# Allegro board avrusb500.brd
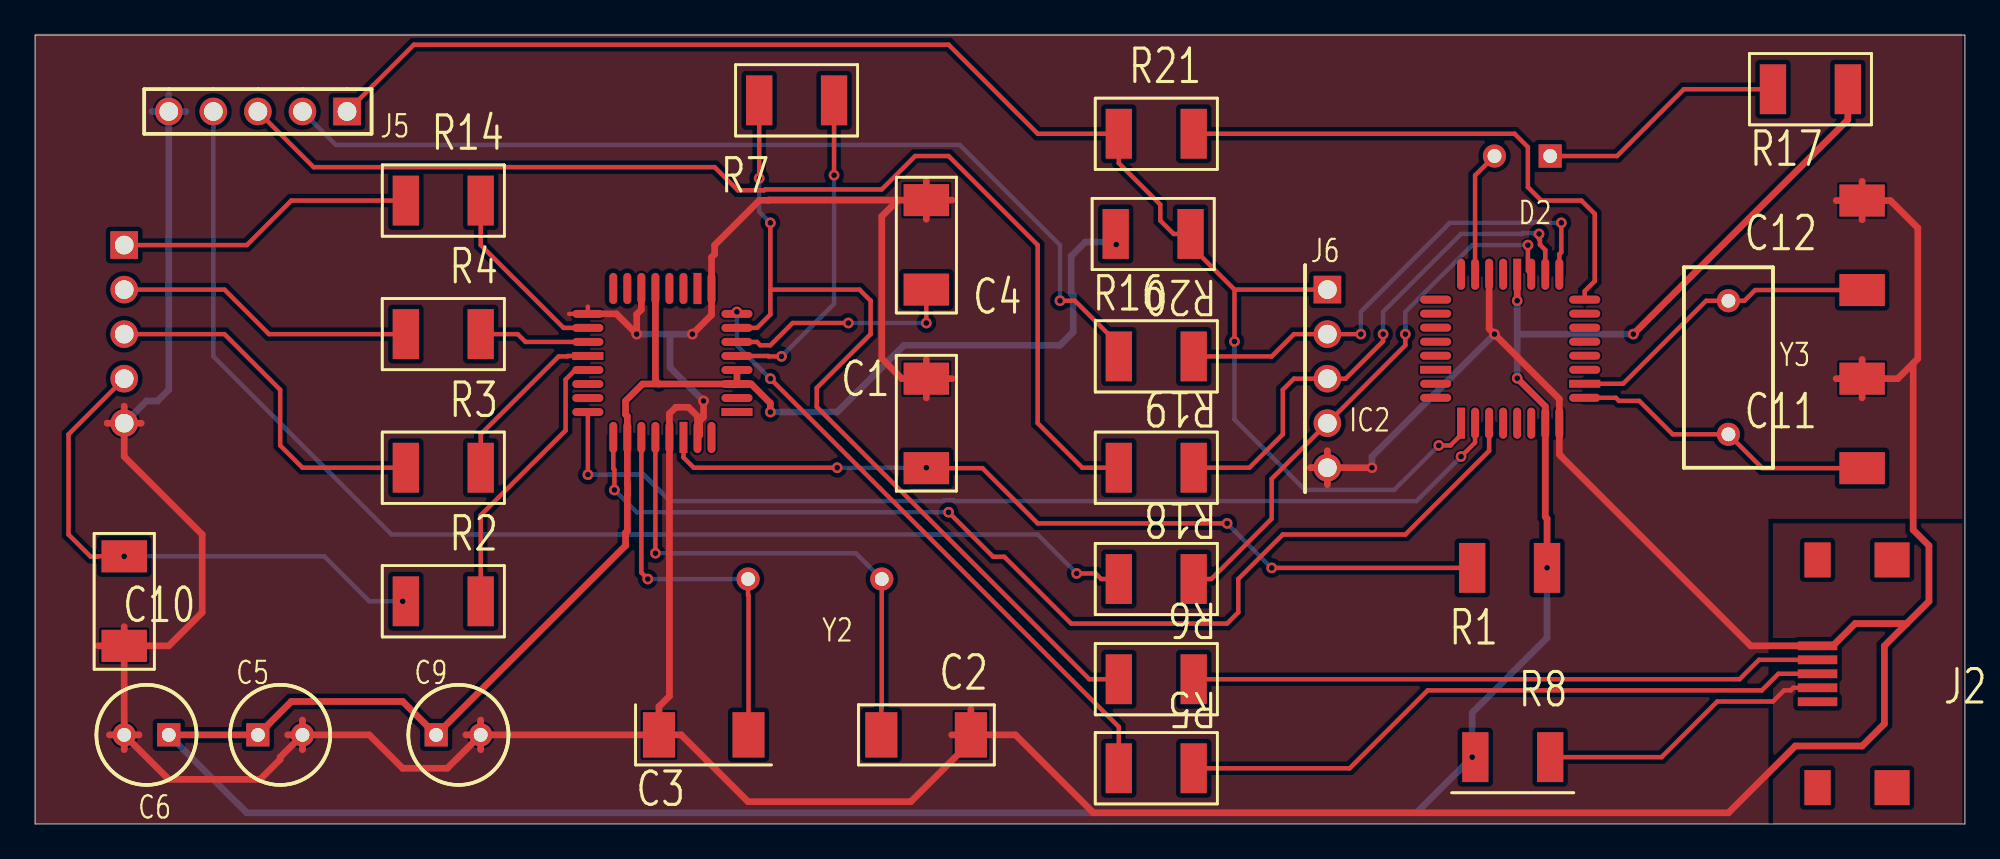
[diagram p0: board, top side]
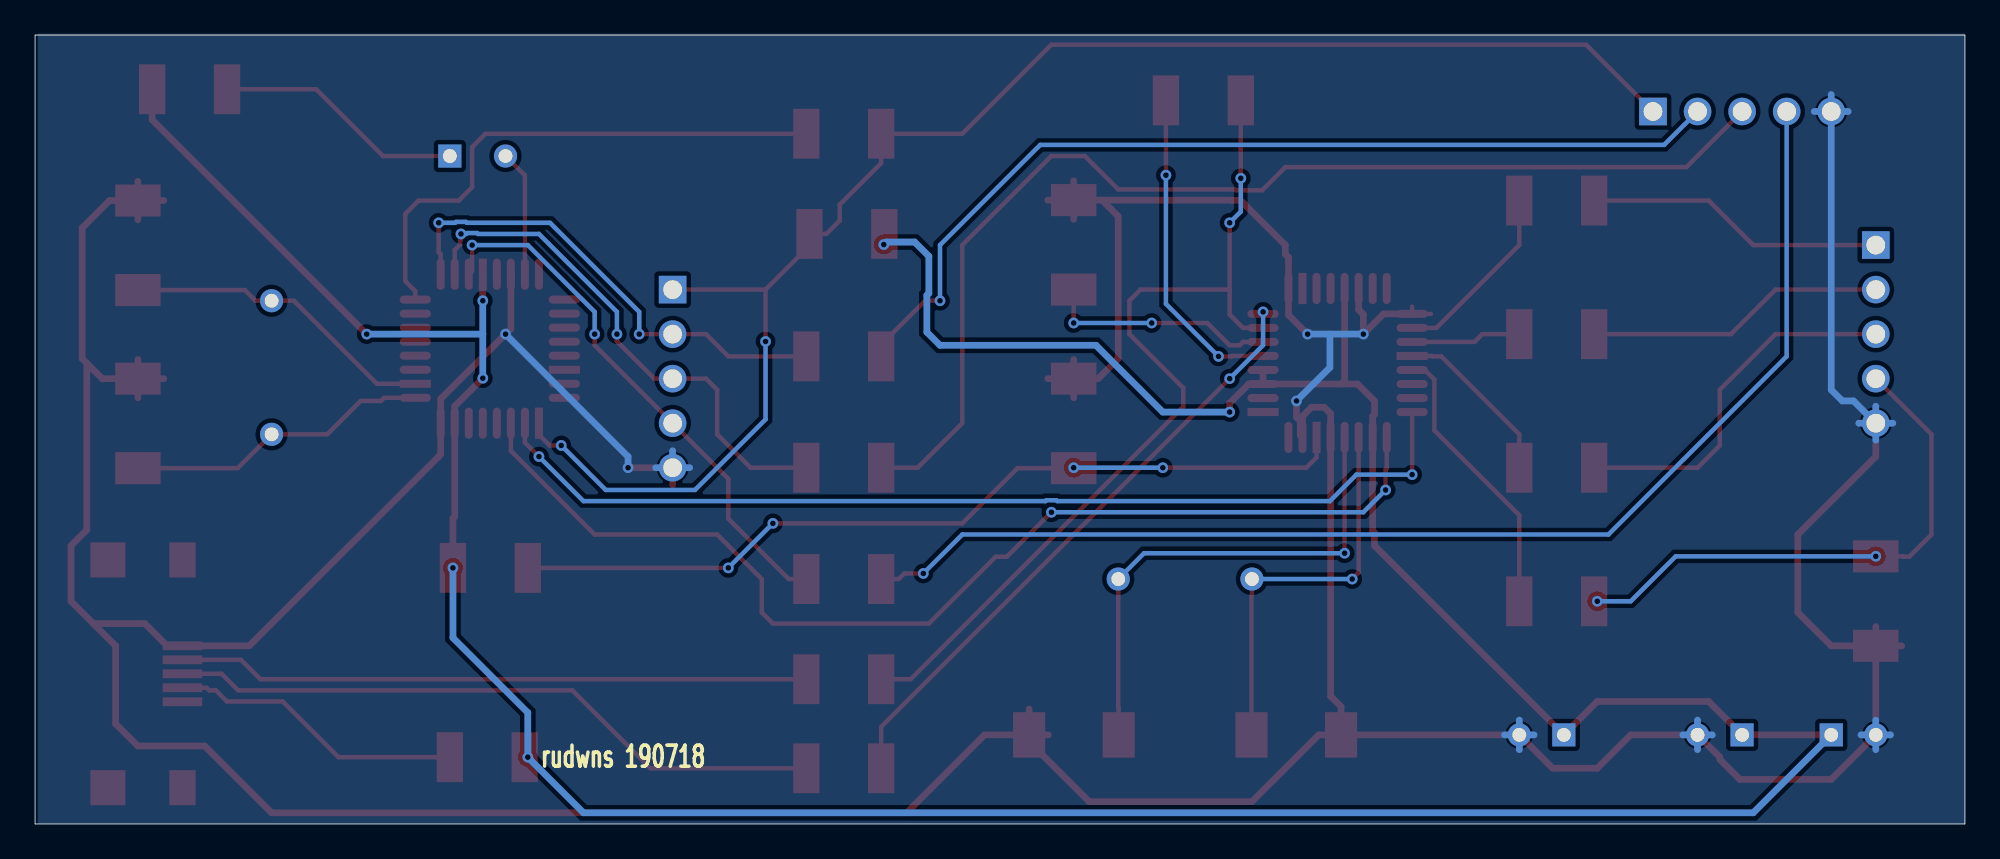
[diagram p1: board, bottom side, seen from below]

Outline 110 x 45 mm; copper layers: TOP, BOTTOM. Coordinates in mm from the lower left corner of the outline.
Outline path: 0,45 110,45 110,0 0,0 0,45

## Design rules (mm)
constraint set DEFAULT: min track width 0.254
net group POWERNETS: nets VCC

## Placement (name value [footprint] x y rotation side)
C1  47nF  [CPCYL1D225LS100031]  50.8 25.4 270 top
C2  27pF  [CPCYL1D225LS100031]  53.34 5.08 180 top
C3  27pF  [CPCYL1D225LS100031]  35.56 5.08 0 top
C4  47nF  [CPCYL1D225LS100031]  50.8 30.48 90 top
C5  100nF  [CPCYL1D225LS100031#2]  12.7 5.08 0 top
C6  1uF  [CPCYL1D225LS100031#2]  7.62 5.08 180 top
C9  100nF  [CPCYL1D225LS100031#2]  22.86 5.08 0 top
C10  22nF  [CPCYL1D225LS100031]  5.08 10.16 90 top
C11  100nF  [CPCYL1D225LS100031]  104.14 25.4 270 top
C12  100nF  [CPCYL1D225LS100031]  104.14 35.56 270 top
D2  LED  [CYLD250LS125031]  86.36 38.1 180 top
IC2  ATmega8  [QUAD80M32WG900]  81.28 22.86 0 top
J1  bbpg_Bitbang  [BLKCON100VHTM1SQSW1005]  5.08 33.02 270 top
J2  USBA  [USBMINIB]  101.6 10.16 270 top
J5  avrusb500_out  [BLKCON100VHTM1SQSW1005]  17.78 40.64 180 top
J6  firmware_in  [BLKCON100VHTM1SQSW1005]  73.66 30.48 270 top
NOREF  -  []  0 45 0 top
NOREF#2  -  []  110 0 90 top
R1  470  [AX400X100031]  81.92 14.61 0 top
R2  220  [AX400X100031]  25.4 12.7 180 top
R3  220  [AX400X100031]  25.4 20.32 180 top
R4  220  [AX400X100031]  25.4 27.94 180 top
R5  27  [AX400X100031]  66.04 3.17 180 top
R6  27  [AX400X100031]  66.04 8.26 180 top
R7  1.5k  [AX400X100031]  41.27 41.27 0 top
R8  2.2  [AX400X100031]  86.36 3.81 180 top
R14  220  [AX400X100031]  25.4 35.56 180 top
R16  10k  [AX400X100031]  61.59 33.66 0 top
R17  470  [AX400X100031]  99.06 41.91 0 top
R18  1k  [AX400X100031]  66.04 13.97 180 top
R19  220  [AX400X100031]  66.04 20.32 180 top
R20  1k  [AX400X100031]  66.04 26.67 180 top
R21  220  [AX400X100031]  66.04 39.37 180 top
U1  FT232BM  [QUAD80M32WG900]  40.01 23.5 90 top
Y2  6Mhz  [RAD450X200LS300031]  48.26 13.97 180 top
Y3  3.6864Mhz  [RAD450X200LS300031]  96.52 29.84 270 top

## Library data of the parts
C1-C4 C10-C12 = CAPACITOR NON-POL: alternate symbols: (SMR2010)
C5 C9 = CAPACITOR NON-POL: alternate symbols: (SMDCAP)
C6 = CAPACITOR POL: alternate symbols: (SMDCAP)
D2 = LED
IC2 = ATmega8-DIL28_1
J1 J5 J6 = CON5
J2 = CON4_6
R1-R8 R14 R16-R21 = R: alternate symbols: (SML2015)
U1 = FT232BM_2: alternate symbols: (JEDECMS026)
Y2 Y3 = ZTA

## Footprints (pads in the part's own frame, mm; a bottom-side part is the same pattern mirrored in y, then rotated)
AX400X100031
  rect 1.499x2.845 smd: 1(0,0) 2(4.267,0)
BLKCON100VHTM1SQSW1005
  rect 1.575x1.575 hole 1.067: 1(0,0)
  round 1.575 hole 1.067: 2(2.54,0) 3(5.08,0) 4(7.62,0) 5(10.16,0)
CPCYL1D225LS100031
  rect 1.829x2.591 smd: 1(0,0) 2(5.105,0)
CPCYL1D225LS100031#2
  rect 1.321x1.321 hole 0.787: 1(0,0)
  round 1.321 hole 0.787: 2(2.54,0)
CYLD250LS125031
  rect 1.321x1.321 hole 0.787: 1(0,0)
  round 1.321 hole 0.787: 2(3.175,0)
QUAD80M32WG900
  rect 0.457x1.778 smd: 1(0,0) 20(3.2,8.496)
  oval 0.457x1.778 smd: 2(0.8,0) 3(1.6,0) 4(2.4,0) 5(3.2,0) 6(4,0) 7(4.801,0) 8(5.601,0) 17(5.601,8.496) 18(4.801,8.496) 19(4,8.496) 21(2.4,8.496) 22(1.6,8.496) 23(0.8,8.496) 24(0,8.496)
  oval 1.778x0.457 smd: 9(7.048,1.448) 11(7.048,3.048) 12(7.048,3.848) 13(7.048,4.648) 14(7.048,5.448) 15(7.048,6.248) 16(7.048,7.048) 25(-1.448,7.048) 26(-1.448,6.248) 27(-1.448,5.448) 28(-1.448,4.648) 29(-1.448,3.848) 31(-1.448,2.248) 32(-1.448,1.448)
  rect 1.778x0.457 smd: 10(7.048,2.248) 30(-1.448,3.048)
RAD450X200LS300031
  round 1.321 hole 0.787: 1(0,0) 2(7.62,0)
USBMINIB
  rect 0.5x2.25 smd: 1(0,0) 2(0.798,0) 3(1.595,0) 4(2.393,0) 5(3.19,0)
  rect 2x1.5 smd: SHIELD1(-4.9,0) SHIELD2(8.09,0)
  rect 2x2 smd: SHIELD3(-4.9,4.25) SHIELD4(8.09,4.25)

## Nets
+5V: J2.4 R8.1
GND: C1.1 C2.1 C3.1 C4.2 C5.2 C6.2 C9.2 C10.1 C11.1 C12.1 IC2.8 IC2.22 J1.5 J2.1 J5.5 J6.5 U1.9 U1.14 U1.17 U1.29 U1.31
VCC: C5.1 C6.1 C9.1 IC2.7(VCC) IC2.20 R1.2 R8.2 R16.1 R17.2 U1.3 U1.4 U1.13 U1.26
BMISO: J1.3 R3.2
BMOSI: J1.2 R4.2
BRESET: J1.1 R14.2
BSCK: C10.2 J1.4 R2.2
D+: J2.2 R6.1
D-: J2.3 R5.1
F_MISO: IC2.18 J6.3 R19.1
F_MOSI: IC2.17 J6.2 R20.1
F_SCK: IC2.19 J6.4 R18.1
MISO: J5.3 R19.2
MOSI: J5.2 R20.2
RESET: IC2.1 J5.1 J6.1 R16.2 R21.2
RXD: IC2.2 U1.24
SCK: J5.4 R18.2
TXD: IC2.3 U1.25
N02483: R6.2 R7.1 U1.7
N02615: R5.2 U1.8
N03527: C4.1 U1.6
N06839: R2.1 U1.21
N06967: R3.1 U1.20
N07033: R4.1 U1.19
N07247: R14.1 U1.18
N11951: R7.2 U1.5
N41098: C3.2 U1.27 Y2.2
N41106: C2.2 U1.28(XTOUT) Y2.1
N49165: C1.2 R1.1 U1.30
N95733: D2.2(CATHODE) IC2.23
N95737: D2.1 R17.1
N95749: C11.2 IC2.9 Y3.2
N95885: C12.2 IC2.10 Y3.1
N96027: IC2.16 R21.1

Pads without a net: IC2 4 5 6 11 12 13 14 15 21 24 25 26 27 28 29 30 31 32; J2 5 SHIELD1 SHIELD2 SHIELD3 SHIELD4; U1 1 2 10 11 12 15 16 22 23 32

## Via types
v1: diameter 0.61, hole 0.33, TOP to BOTTOM, 42 vias

## Routing (per net, layer and track width the routed paths; a pad name or vN(x,y) marks a point on that pad's centre or on a via; arc(x,y) is an arc through that point)
+5V: length 16.9
  TOP w0.254: R8.1 92.71,3.81 95.89,6.99 99.06,6.99 99.69,7.62 100.07,7.62 100.22,7.77 J2.4
GND: length 363.6
  TOP w0.254: 31.51,29.5 U1.17 30.44,29.1
  TOP w0.381: C5.2 13.97,3.81 13.97,3.68 12.83,2.54 7.62,2.54 C6.2 ; C5.2 15.24,4.24 ; C5.2 15.24,5.92 ; C5.2 14.4,5.08 ; C5.2 19.05,5.08 20.95,3.17 23.5,3.17 C9.2 ; C12.1 104.14,36.66 ; C12.1 102.66,35.56 ; C12.1 105.75,35.56 107.31,34 107.31,26.54 107.05,26.28 ; C12.1 104.14,34.47 ; J1.5 6.05,22.86 ; J1.5 4.11,22.86 ; J1.5 5.08,20.95 9.53,16.51 9.53,12.06 7.62,10.16 C10.1 ; J1.5 5.08,23.83 ; 106.68,11.43 103.75,11.43 102.47,10.16 J2.1 97.79,10.16 87,20.95 87,20.97 86.88,21.08 IC2.8 86.88,24.24 v1(83.19,27.94) 82.88,28.25 IC2.22 ; 106.68,11.43 107.95,12.7 107.95,15.88 107.05,16.77 107.05,26.28 ; 106.68,11.43 105.41,10.16 105.41,5.71 104.14,4.45 100.33,4.45 96.52,0.64 60.33,0.64 55.88,5.08 C2.1 ; 3.6,10.16 C10.1 ; C10.1 5.08,11.26 ; C10.1 C6.2 ; v1(37.47,27.94) 38.56,29.03 U1.9 38.56,32.32 38.73,32.5 38.73,33.02 41.29,35.57 41.8,35.57 41.81,35.59 49.19,35.59 ; C9.2 25.4,5.92 ; C9.2 24.56,5.08 ; C9.2 C3.1 ; C9.2 25.4,4.24 ; C1.1 50.8,26.5 ; C1.1 52.28,25.4 ; C1.1 49.4,25.4 48.26,26.54 48.26,34.66 49.19,35.59 ; C1.1 50.8,24.3 ; U1.14 34.56,29.34 34.29,29.07 v1(34.29,27.94) 33.13,29.1 U1.17 ; 107.05,26.28 106.17,25.4 C11.1 ; 50.8,34.49 C4.2 ; C4.2 49.19,35.59 ; C4.2 52.28,35.59 ; C4.2 50.8,36.68 ; C6.2 4.24,5.08 ; C6.2 5.92,5.08 ; C6.2 5.08,4.24 ; C11.1 104.14,26.5 ; C11.1 104.14,24.3 ; C11.1 102.66,25.4 ; 73.66,19.35 J6.5 ; J6.5 v1(76.2,20.32) ; J6.5 73.66,21.29 ; J6.5 72.69,20.32 ; C2.1 53.34,6.56 ; C2.1 53.34,4.7 49.91,1.27 40.64,1.27 36.83,5.08 C3.1 ; C2.1 52.24,5.08 ; v1(38.1,24.13) 38.1,23.2 37.88,22.99 37.88,22.17 37.76,22.05 37.76,23.25 37.24,23.77 36.52,23.77 36.16,23.41 U1.29 36.16,7.29 35.56,6.69 C3.1
  BOTTOM w0.381: 36.2,27.94 36.2,26.04 v1(38.1,24.13) ; 36.2,27.94 v1(34.29,27.94) ; 36.2,27.94 v1(37.47,27.94) ; 4.24,5.08 C6.2 ; C6.2 5.08,5.92 ; C6.2 5.08,4.24 ; C6.2 5.92,5.08 ; 6.65,40.64 J5.5 ; J5.5 7.62,24.77 6.99,24.13 6.35,24.13 J1.5 ; J5.5 8.59,40.64 ; J5.5 7.62,41.61 ; C5.2 15.24,5.92 ; C5.2 15.24,4.24 ; C5.2 16.08,5.08 ; C5.2 14.4,5.08 ; J1.5 5.08,23.83 ; J1.5 4.11,22.86 ; J1.5 6.05,22.86 ; J1.5 5.08,21.89 ; C9.2 26.24,5.08 ; C9.2 25.4,5.92 ; C9.2 24.56,5.08 ; C9.2 25.4,4.24 ; v1(76.2,20.32) 76.2,20.95 v1(83.19,27.94) ; 72.69,20.32 J6.5 ; J6.5 74.63,20.32 ; J6.5 73.66,21.29
VCC: length 216
  TOP w0.381: 35.56,25.09 34.62,25.09 33.66,24.13 33.66,23.36 33.76,23.25 33.76,19.37 33.77,19.36 33.77,18.74 33.76,18.73 33.76,16.71 33.66,16.61 33.66,15.88 C9.1 20.95,6.99 14.61,6.99 C5.1 C6.1 ; 35.56,25.09 35.36,25.3 U1.13 ; 35.56,25.09 U1.3 ; U1.3 40.82,25.09 41.91,24 v1(41.91,23.5) ; U1.3 U1.4 ; IC2.20 v1(84.48,29.84) ; v1(84.48,25.43) 86.08,23.82 IC2.7 86.08,17.53 86.18,17.43 v1(86.18,14.61) ; v1(91.1,27.94) 103.33,40.17 R17.2
  BOTTOM w0.381: 84.48,27.94 v1(84.48,25.43) ; 84.48,27.94 v1(91.1,27.94) ; 84.48,27.94 v1(84.48,29.84) ; C6.1 12.06,0.64 78.74,0.64 v1(81.92,3.81) 81.92,6.35 86.18,10.62 v1(86.18,14.61) ; v1(41.91,23.5) 45.72,23.5 49.53,27.3 58.42,27.3 59.17,28.05 59.17,30.16 59.05,30.27 59.05,32.38 59.86,33.19 61.48,33.19 v1(61.62,33.05)
BMISO: length 21.1
  TOP w0.254: J1.3 10.79,27.94 13.97,24.77 13.97,21.59 15.24,20.32 R3.2
BMOSI: length 17.1
  TOP w0.254: J1.2 10.79,30.48 13.34,27.94 R4.2
BRESET: length 17.1
  TOP w0.254: J1.1 12.06,33.02 14.61,35.56 R14.2
BSCK: length 30.9
  TOP w0.254: v1(5.08,15.27) 3.53,15.27 3.5,15.24 3.17,15.24 1.91,16.51 1.91,22.23 J1.4
  BOTTOM w0.254: v1(20.95,12.7) 19.05,12.7 16.48,15.27 v1(5.08,15.27)
D+: length 36
  TOP w0.254: J2.2 98.26,9.36 97.16,8.26 R6.1
D-: length 37.8
  TOP w0.254: R5.1 74.93,3.17 79.38,7.62 98.42,7.62 99.37,8.56 J2.3
F_MISO: length 30.2
  TOP w0.254: R19.1 69.22,20.32 71.12,22.23 71.12,24.77 71.75,25.4 J6.3 74.7,25.4 76.83,27.53 v1(76.83,27.94) ; v1(85.72,33.66) 85.72,33.36 85.78,33.3 85.78,33.04 86.08,32.74 IC2.18
  BOTTOM w0.254: v1(76.83,27.94) 76.83,29.21 81.28,33.66 84.75,33.66 84.81,33.71 85.38,33.71 85.43,33.66 v1(85.72,33.66)
F_MOSI: length 27.9
  TOP w0.254: v1(87,34.29) 87,32.61 86.88,32.5 IC2.17 ; R20.1 70.48,26.67 71.75,27.94 J6.2 v1(75.56,27.94)
  BOTTOM w0.254: v1(87,34.29) 86.06,34.29 86.01,34.34 85.44,34.34 85.39,34.29 80.64,34.29 75.56,29.21 v1(75.56,27.94)
F_SCK: length 31.1
  TOP w0.254: v1(78.11,27.94) 78.11,27.3 J6.4 70.48,19.68 70.48,17.41 67.04,13.97 R18.1 ; IC2.19 85.09,31.55 v1(85.09,33.02)
  BOTTOM w0.254: v1(78.11,27.94) 78.11,29.21 81.92,33.02 v1(85.09,33.02)
MISO: length 65.1
  TOP w0.254: R19.2 59.69,20.32 57.15,22.86 57.15,33.02 52.07,38.1 50.16,38.1 48.26,36.2 41.61,36.2 41.56,36.14 40.06,36.14 38.73,37.47 15.88,37.47 J5.3
MOSI: length 54.6
  TOP w0.254: R20.2 61.77,27.34 59.27,29.84 v1(58.42,29.84)
  BOTTOM w0.254: J5.2 17.14,38.73 52.7,38.73 58.42,33.02 v1(58.42,29.84)
RESET: length 89.1
  TOP w0.254: 68.36,30.48 65.86,32.98 R16.2 64.9,33.66 64.14,34.42 64.14,35.33 61.77,37.69 R21.2 57.15,39.37 52.07,44.45 21.59,44.45 J5.1 ; 68.36,30.48 J6.1 ; 68.36,30.48 v1(68.36,27.52) ; IC2.1 81.28,22.2 80.67,21.59 v1(80.01,21.59)
  BOTTOM w0.254: v1(68.36,27.52) 68.36,23.08 72.39,19.05 77.47,19.05 v1(80.01,21.59)
RXD: length 57.3
  TOP w0.254: IC2.2 82.08,21.75 v1(81.28,20.95) ; U1.24 v1(31.51,19.93)
  BOTTOM w0.254: v1(31.51,19.93) 34.68,19.93 36.2,18.41 51.73,18.41 51.78,18.47 52.35,18.47 52.41,18.41 78.74,18.41 v1(81.28,20.95)
SCK: length 70.8
  TOP w0.254: v1(59.37,14.29) 60.45,14.29 60.77,13.97 R18.2
  BOTTOM w0.254: v1(59.37,14.29) 57.15,16.51 20.32,16.51 10.16,26.67 J5.4
TXD: length 62.8
  TOP w0.254: v1(33.02,19.05) 33.02,20.21 32.96,20.27 U1.25 ; v1(52.07,17.78) 54.61,15.24 55.24,15.24 59.05,11.43 67.94,11.43 68.58,12.06 68.58,13.97 71.12,16.51 78.11,16.51 82.88,21.29 IC2.3
  BOTTOM w0.254: v1(52.07,17.78) 34.29,17.78 v1(33.02,19.05)
N02483: length 51.7
  TOP w0.254: 41.91,30.48 41.91,29.06 41.15,28.3 U1.7 ; 41.91,30.48 46.99,30.48 47.62,29.84 47.62,27.94 44.55,24.87 44.55,23.79 60.09,8.26 R6.2 ; 41.91,30.48 v1(41.91,34.29) ; R7.1 v1(41.27,36.83)
  BOTTOM w0.254: v1(41.91,34.29) 41.27,34.92 v1(41.27,36.83)
N02615: length 35.1
  TOP w0.254: R5.2 61.77,5.54 v1(41.91,25.4)
  BOTTOM w0.254: v1(40.01,29.21) 40.01,27.3 v1(41.91,25.4)
N03527: length 13.3
  TOP w0.254: U1.6 41.15,27.5 41.34,27.3 41.91,27.3 43.18,28.57 v1(46.35,28.57) ; C4.1 v1(50.8,28.57)
  BOTTOM w0.254: v1(50.8,28.57) v1(46.35,28.57)
N06839: length 16.1
  TOP w0.254: R2.1 25.4,17.61 30.24,22.45 30.24,25.35 30.79,25.89 U1.21
N06967: length 9.9
  TOP w0.254: U1.20 30.37,26.7 30.34,26.67 29.84,26.67 25.4,22.23 R3.1
N07033: length 6.3
  TOP w0.254: U1.19 27.95,27.5 27.51,27.94 R4.1
N07247: length 10.6
  TOP w0.254: R14.1 25.4,33.02 30.12,28.3 U1.18
N11951: length 18.4
  TOP w0.254: v1(42.55,26.67) 41.81,26.67 41.78,26.7 U1.5 ; R7.2 v1(45.54,37.01)
  BOTTOM w0.254: v1(45.54,37.01) 45.54,29.67 v1(42.55,26.67)
N41098: length 22.8
  TOP w0.254: v1(34.92,13.97) 34.56,14.34 U1.27 ; Y2.2 40.64,13.05 40.66,13.03 40.66,5.08
  BOTTOM w0.254: v1(34.92,13.97) Y2.2
N41106: length 29
  TOP w0.254: U1.28 v1(35.36,15.44) ; Y2.1 48.26,6.66 48.23,6.63 C2.2
  BOTTOM w0.254: Y2.1 46.79,15.44 v1(35.36,15.44)
N49165: length 48.7
  TOP w0.254: 50.8,20.3 54,20.3 57.15,17.14 v1(67.94,17.14) ; R1.1 v1(70.48,14.61) ; U1.30 36.96,20.9 37.54,20.32 v1(45.72,20.32)
  BOTTOM w0.254: v1(45.72,20.32) v1(50.8,20.32) ; v1(70.48,14.61) v1(67.94,17.14)
N95733: length 7.2
  TOP w0.254: D2.2 82.08,36.99 IC2.23
N95737: length 14.3
  TOP w0.254: D2.1 90.17,38.1 93.98,41.91 R17.1
N95749: length 17.5
  TOP w0.254: IC2.9 90.11,24.31 90.28,24.13 91.44,24.13 93.34,22.23 Y3.2 98.45,20.3 104.14,20.3
N95885: length 18
  TOP w0.254: IC2.10 90.51,25.11 95.25,29.84 Y3.1 97.44,29.84 98.05,30.45 C12.2
N96027: length 31.2
  TOP w0.254: R21.1 84.33,39.37 85.09,38.61 85.09,36.32 85.85,35.56 88.14,35.56 88.9,34.8 88.9,30.96 88.33,30.39 IC2.16

## Copper pours and planes (outline as drawn; the poured copper is in the pictures)
+5V on TOP: 99.06,17.14 99.06,0 109.86,0 109.86,17.14
GND on TOP, BOTTOM: 0,45.09 0,0 109.86,0 109.86,45.09

## Text on the board
Ref Des/Silkscreen Bottom: rudwns 190718
NCLEGEND-1-2: FIGURE | FINISHED_SIZE | 0.33 | 0.787 | 1.067 | DRILL CHART: TOP to BOTTOM | ALL UNITS ARE IN MILLIMETERS | PLATED | QTY | 44 | 12 | 15
